# Altium PCB PCB1.PcbDoc
Units mm, origin at the board's own origin, x right, y up, seen from the top; angles counter-clockwise.
Board outline 50.31 x 50.26 mm, 4 copper layers (Top Layer, POWER, GND, Bottom Layer), stack 0.778 mm thick; 53 components, 117 nets, 397 pads, 103 vias.
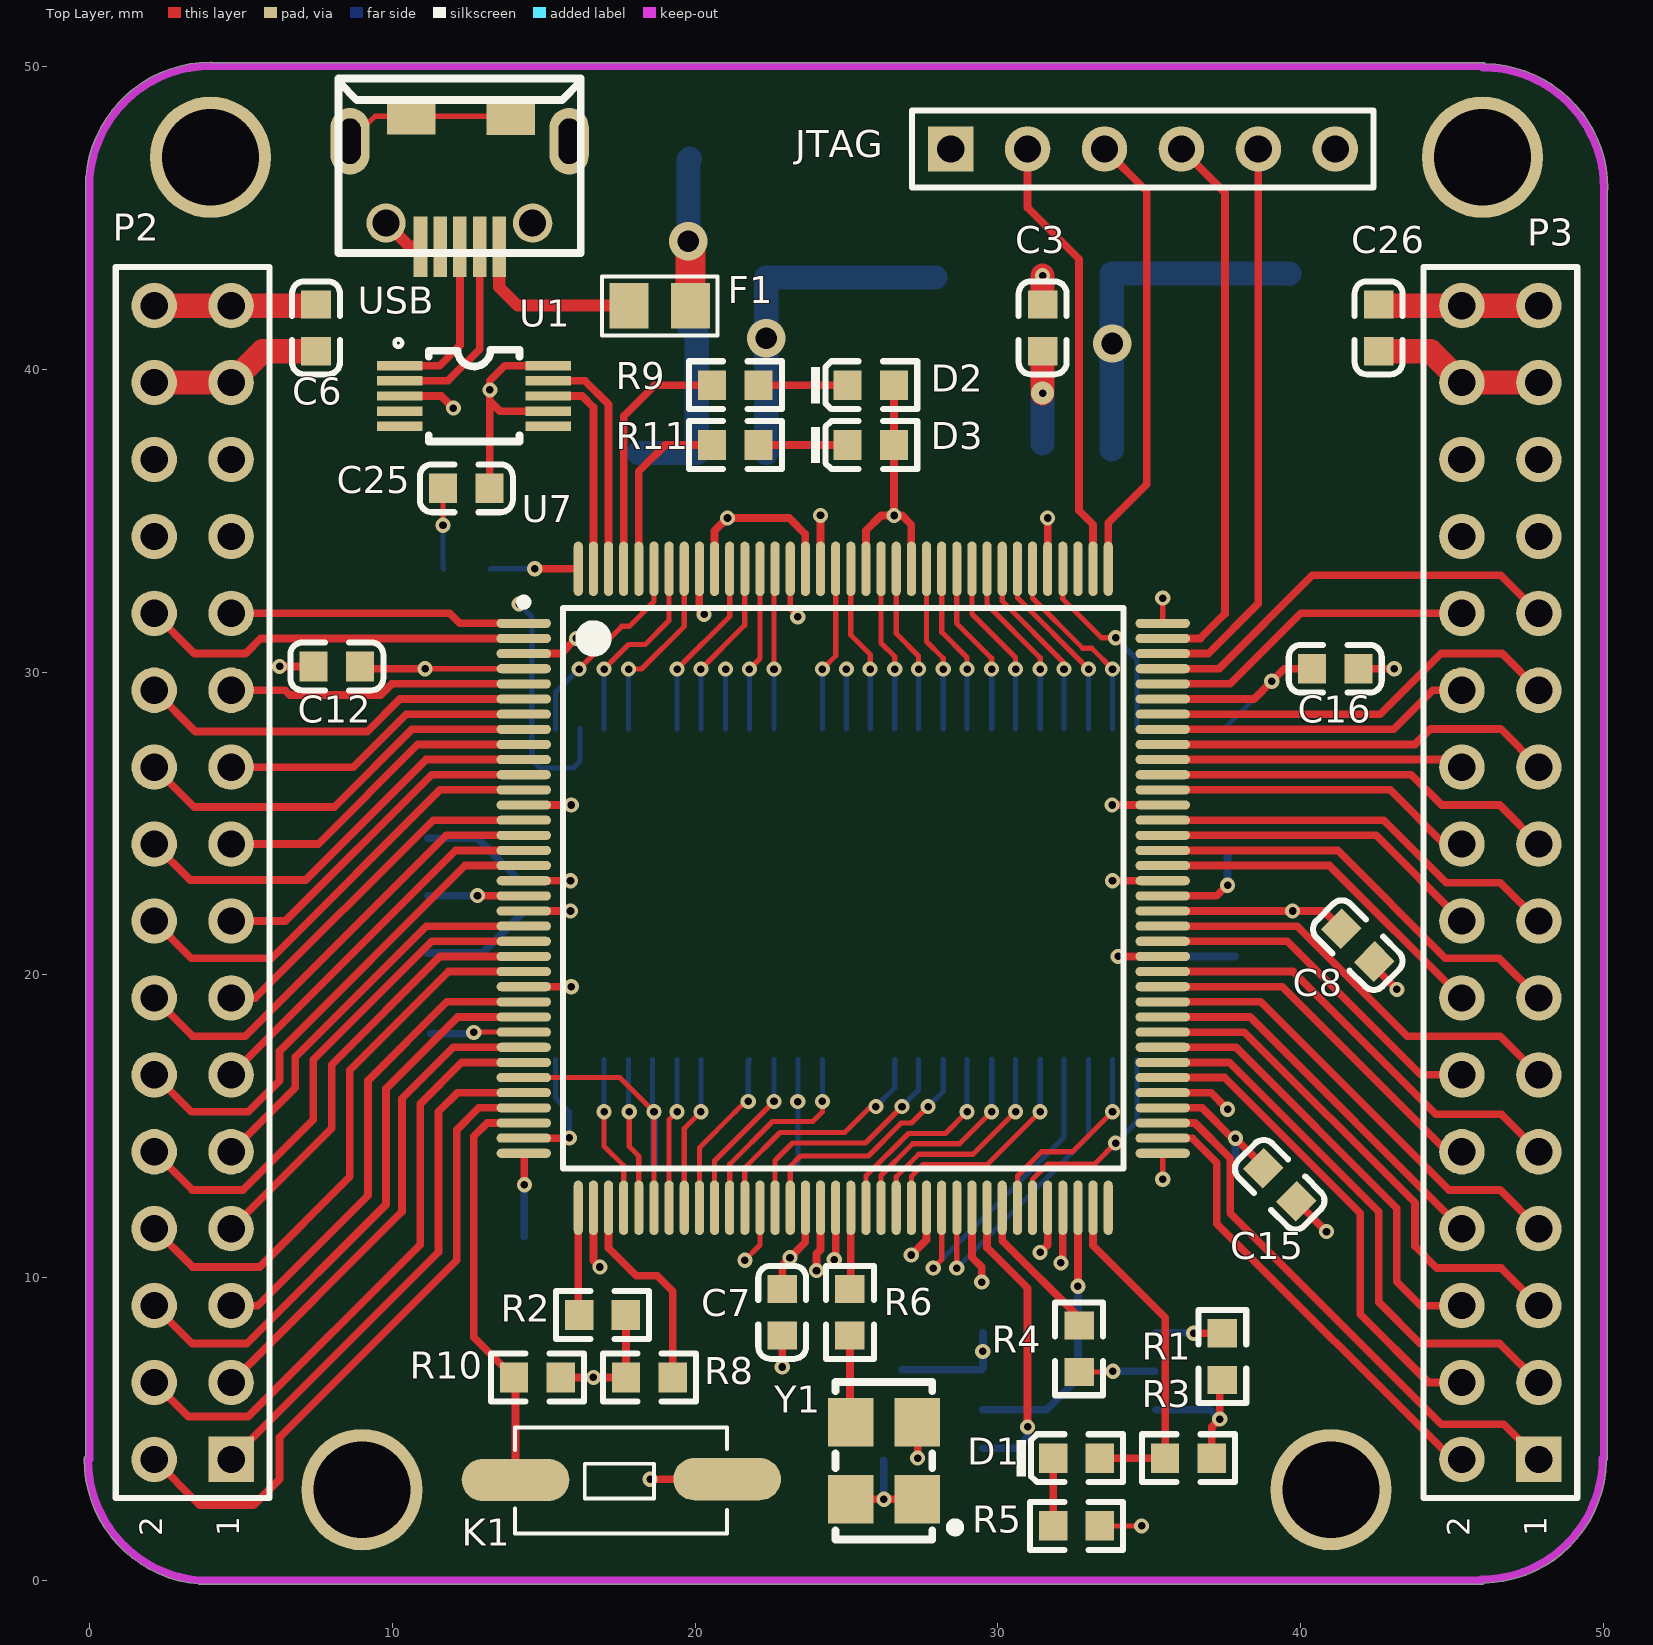
[diagram p0: Top Layer view]
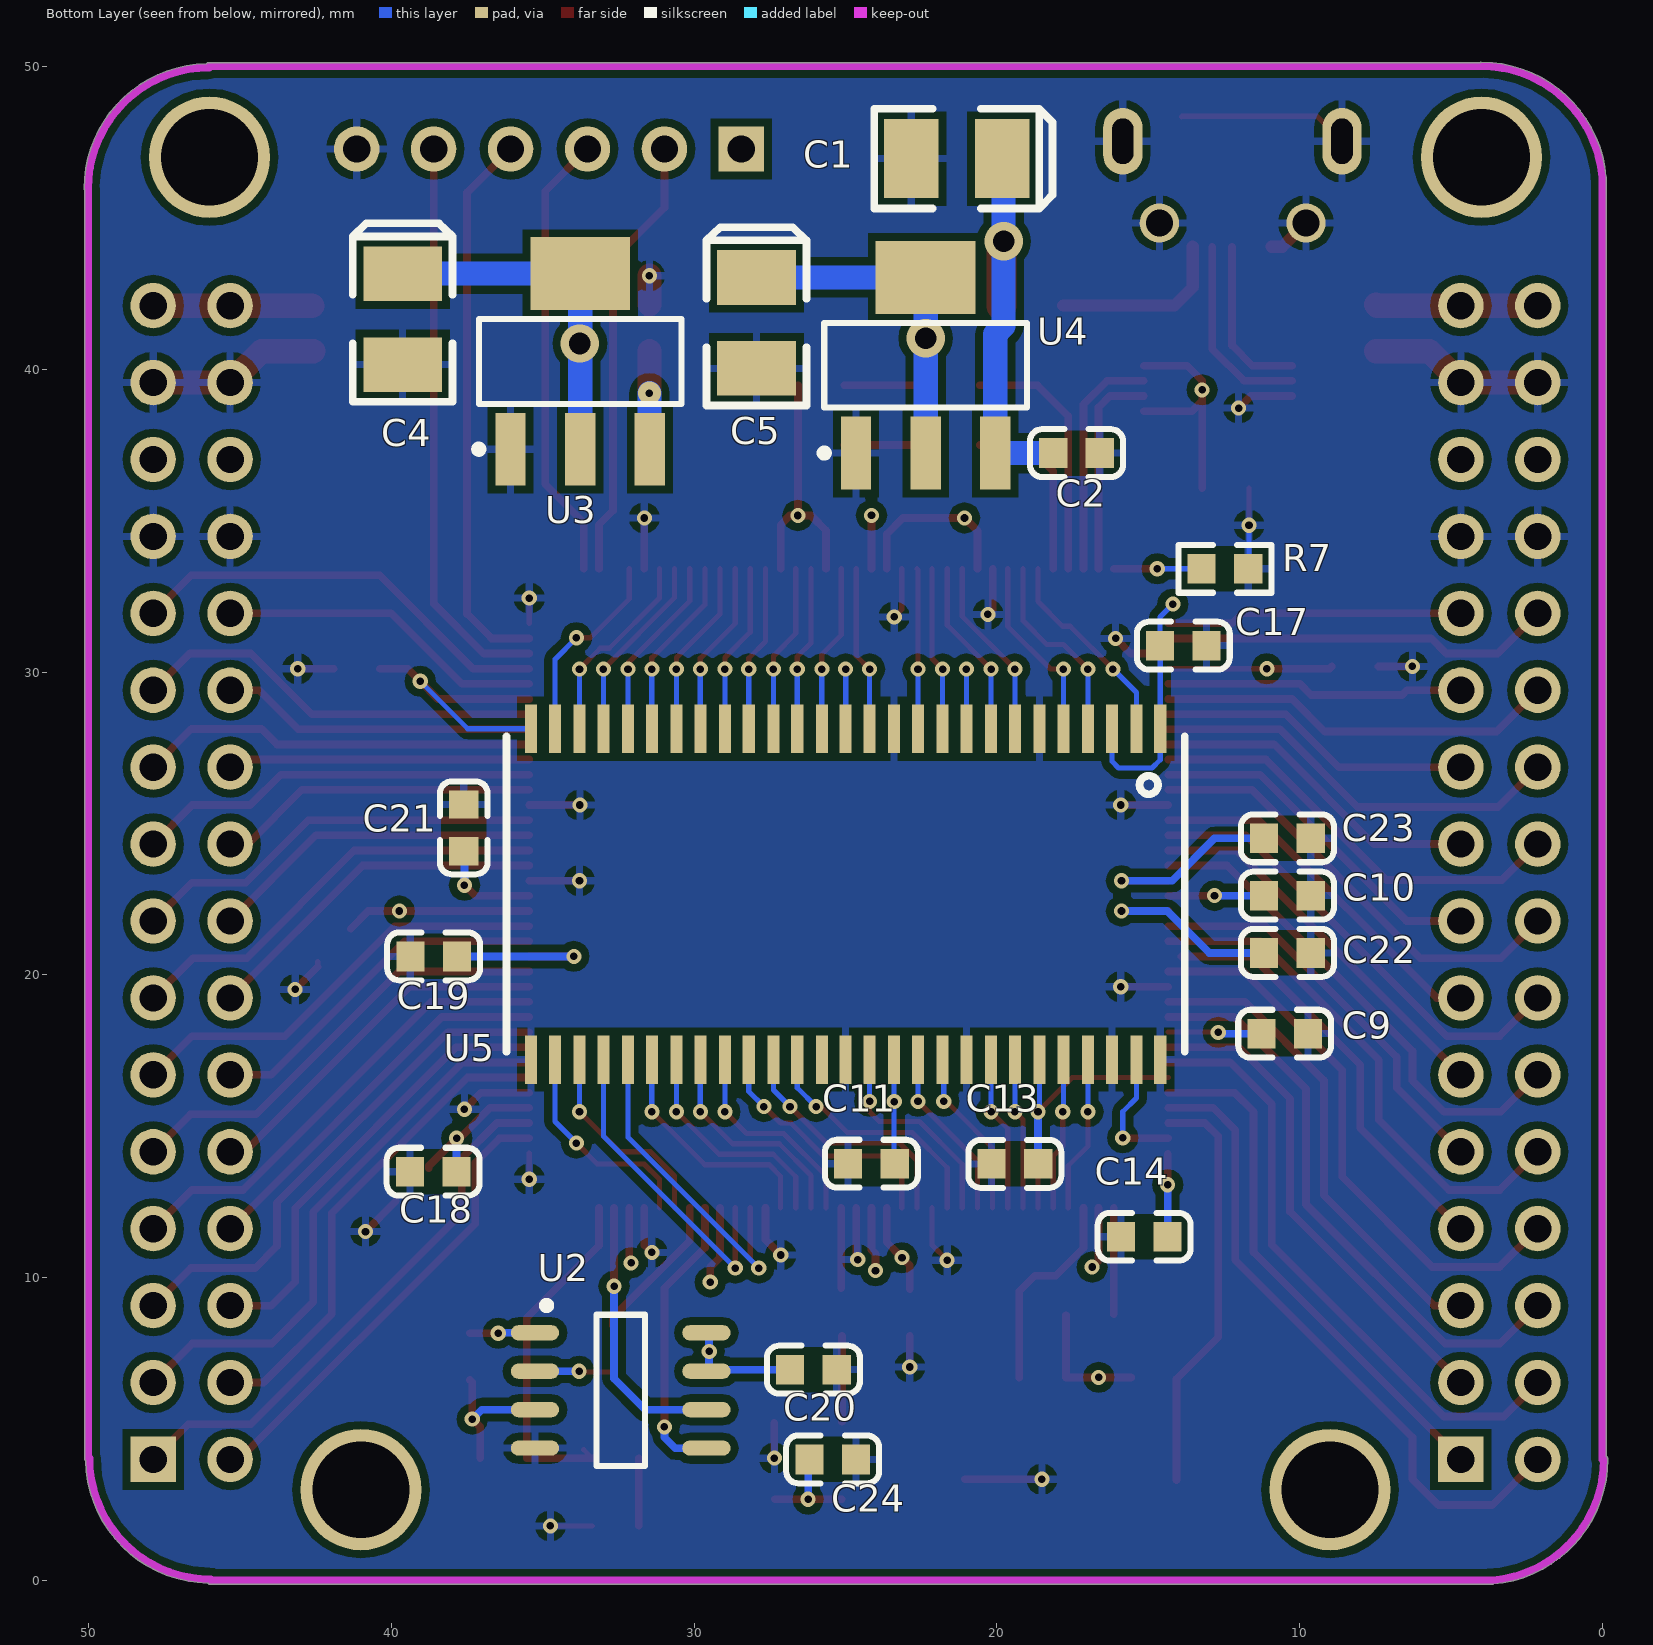
[diagram p1: Bottom Layer view, seen from below]
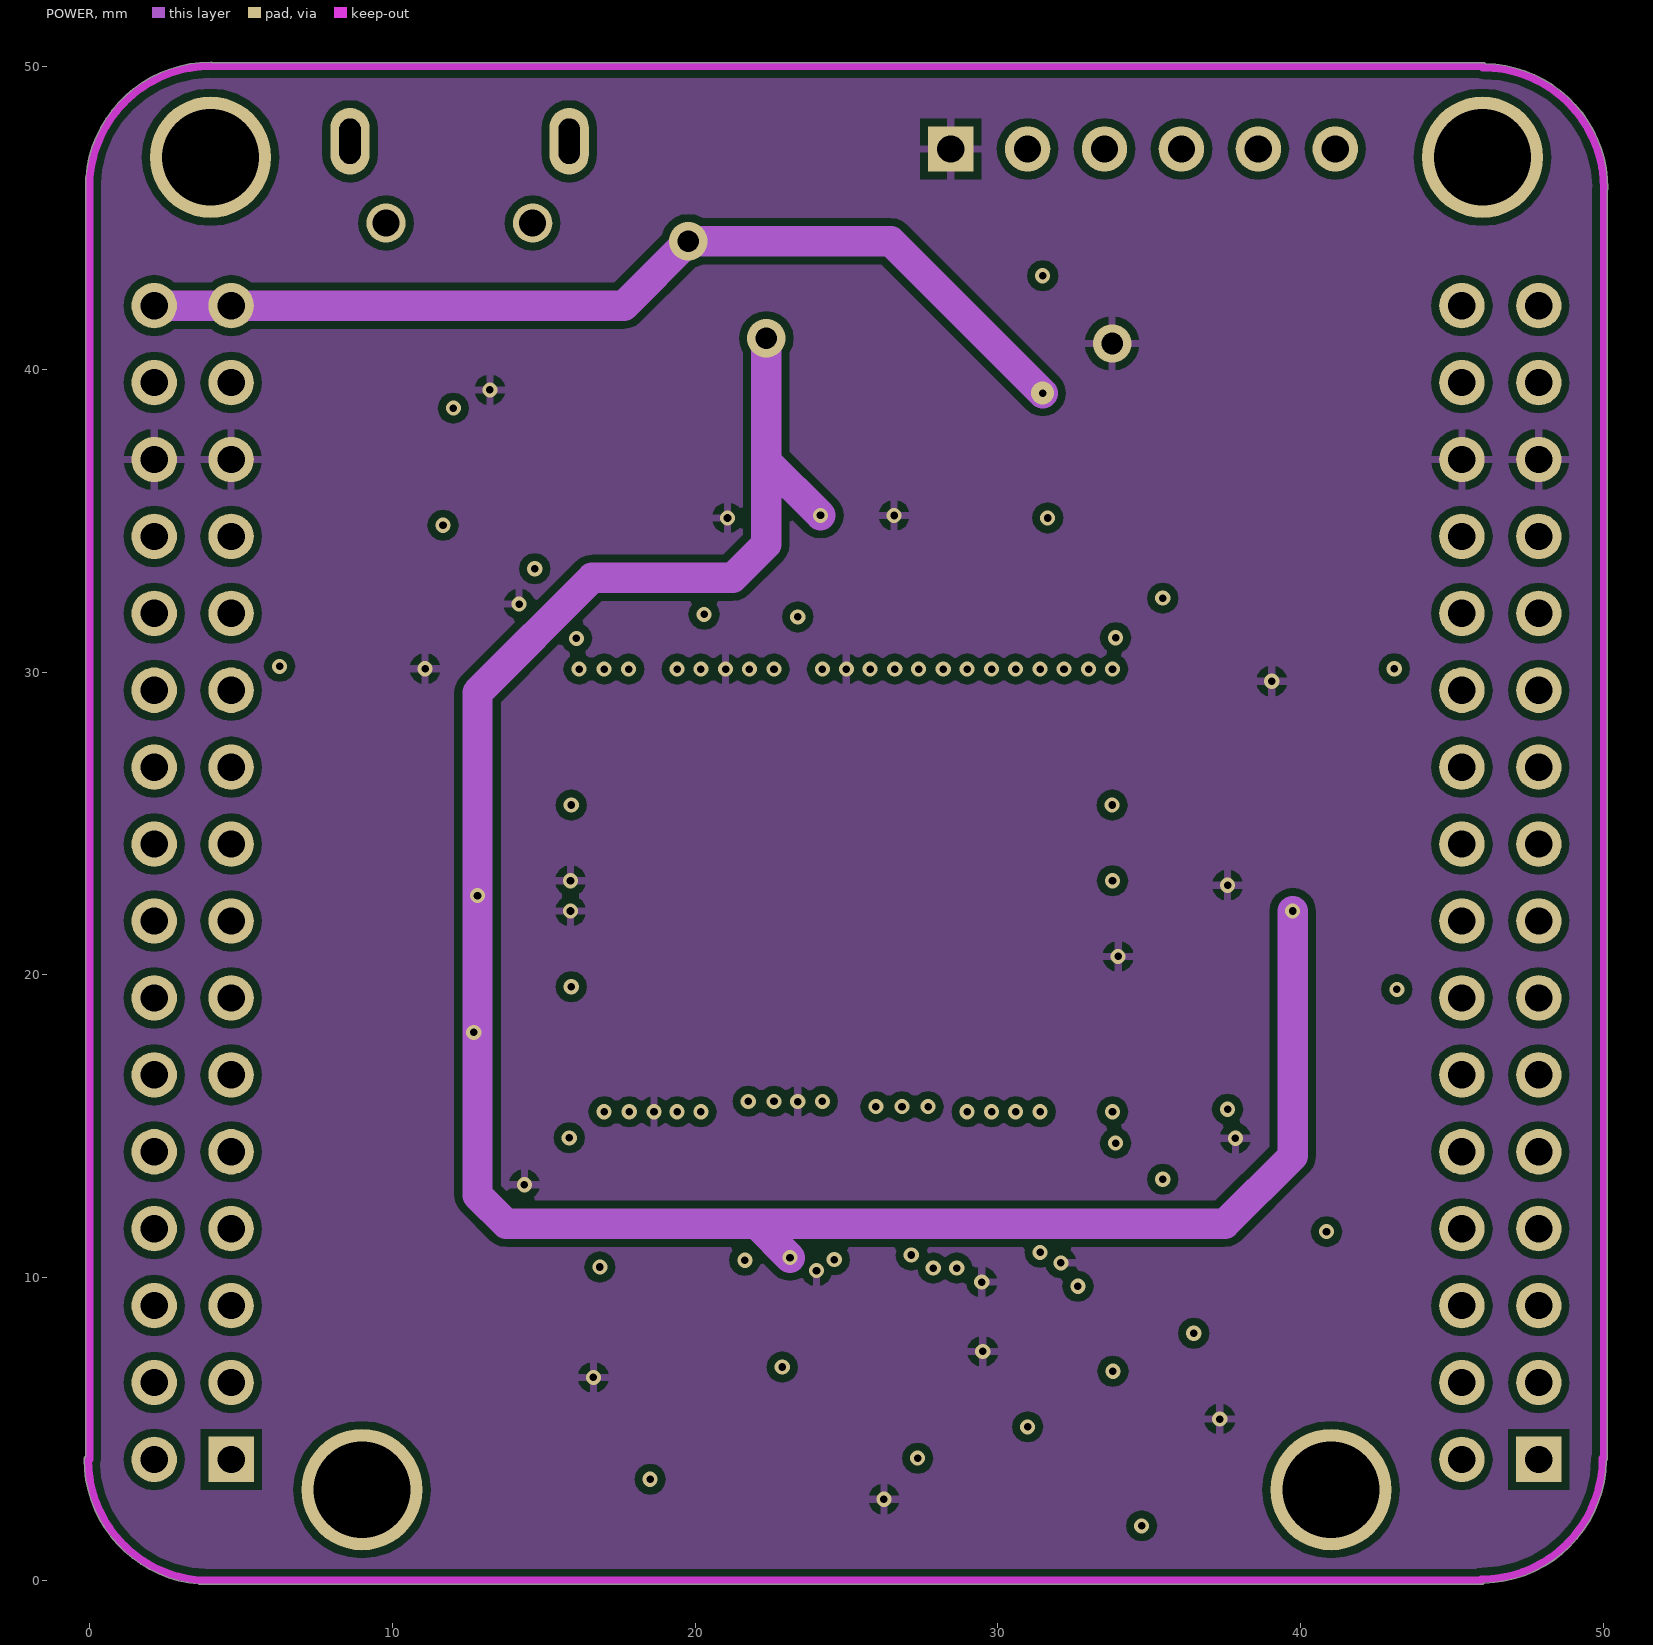
[diagram p2: POWER]
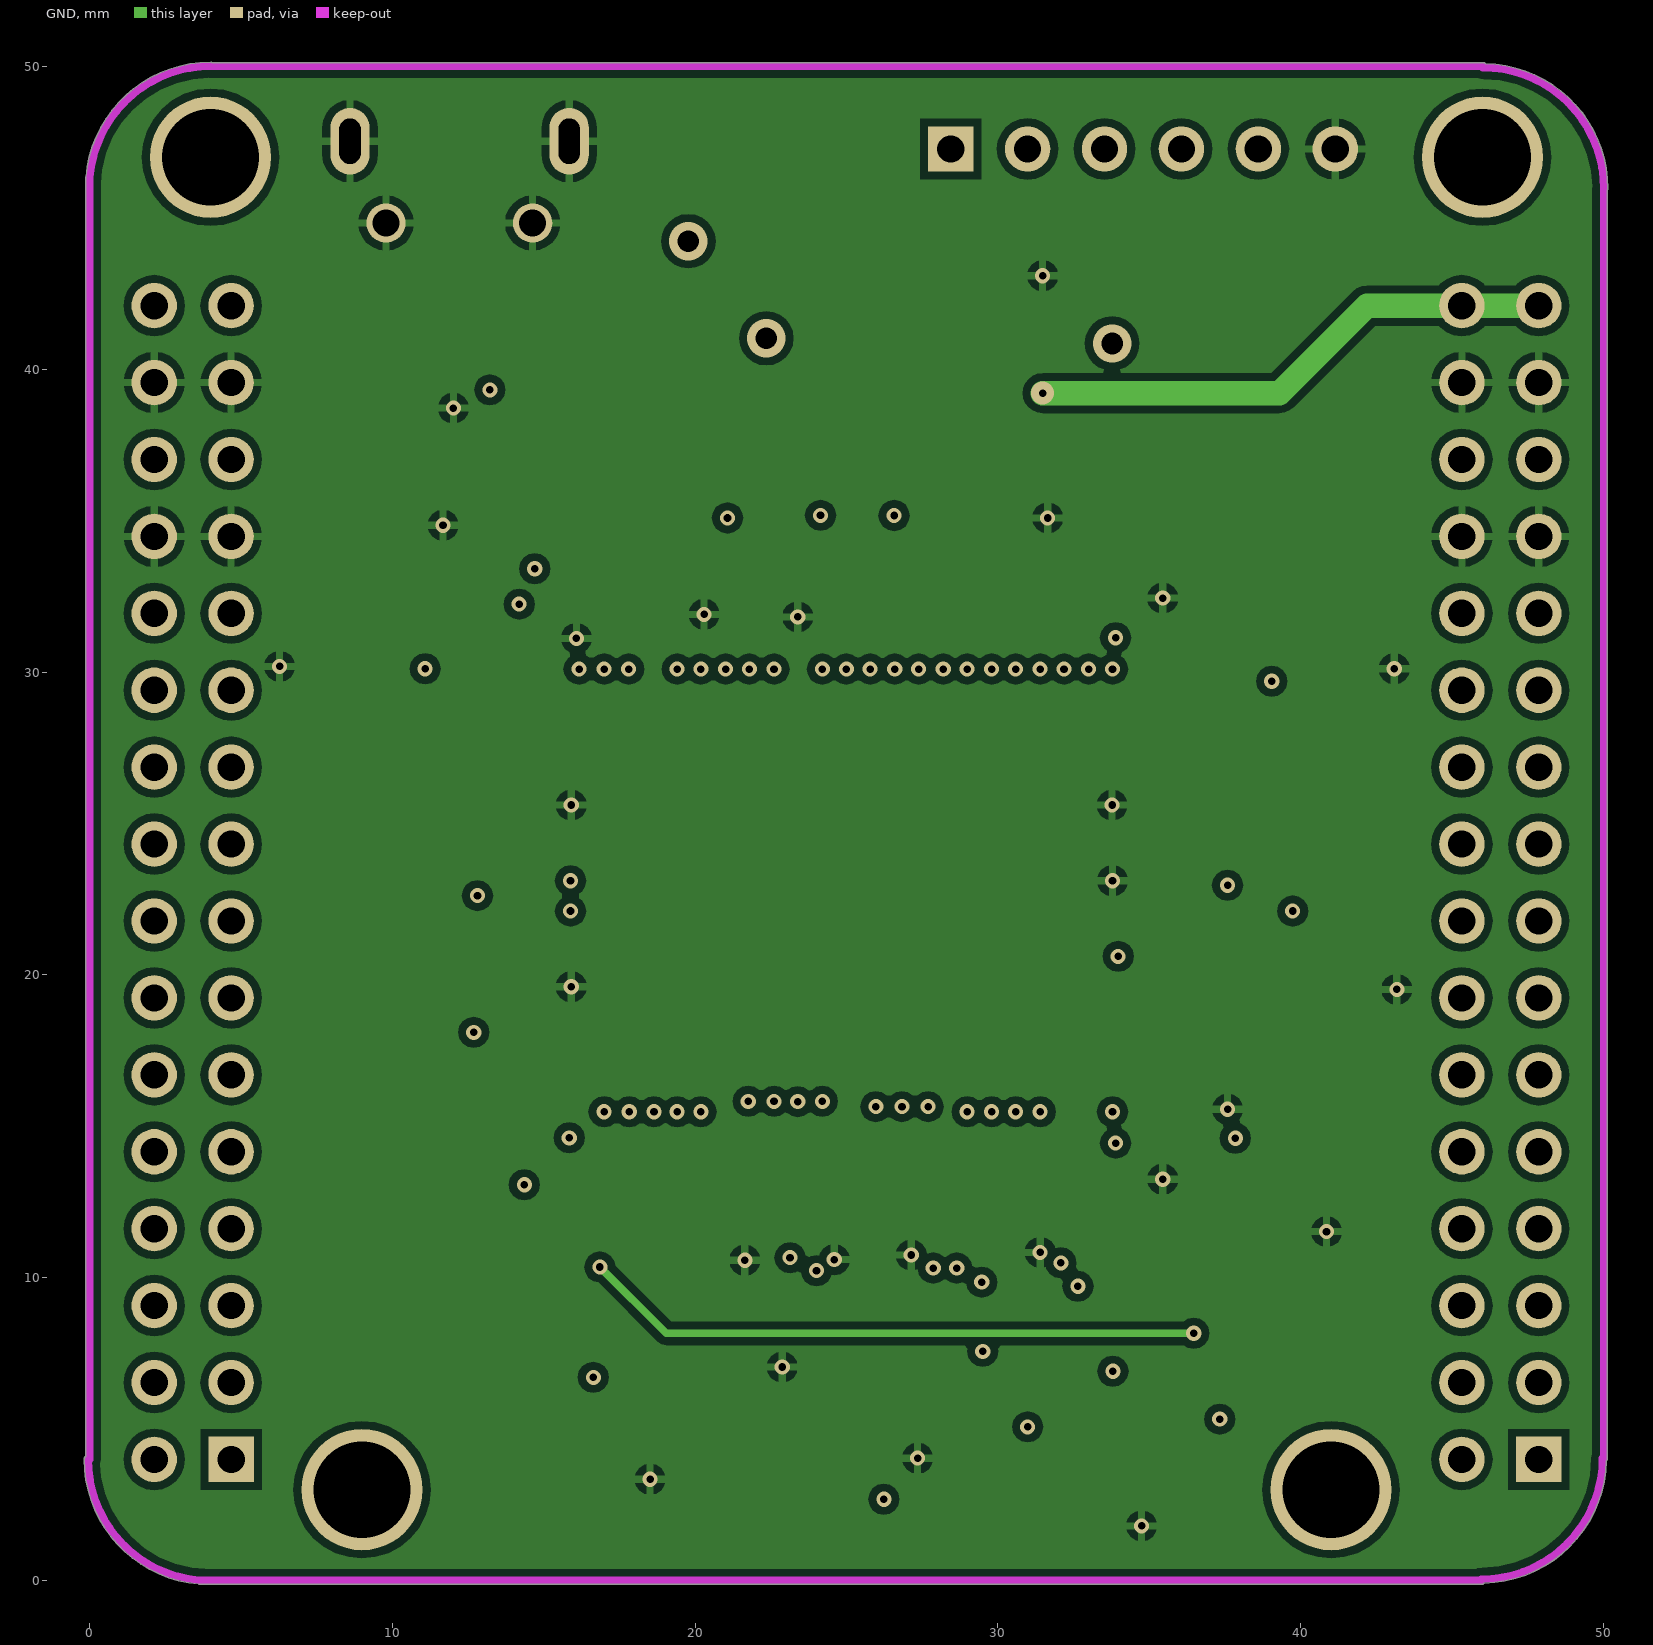
[diagram p3: GND]
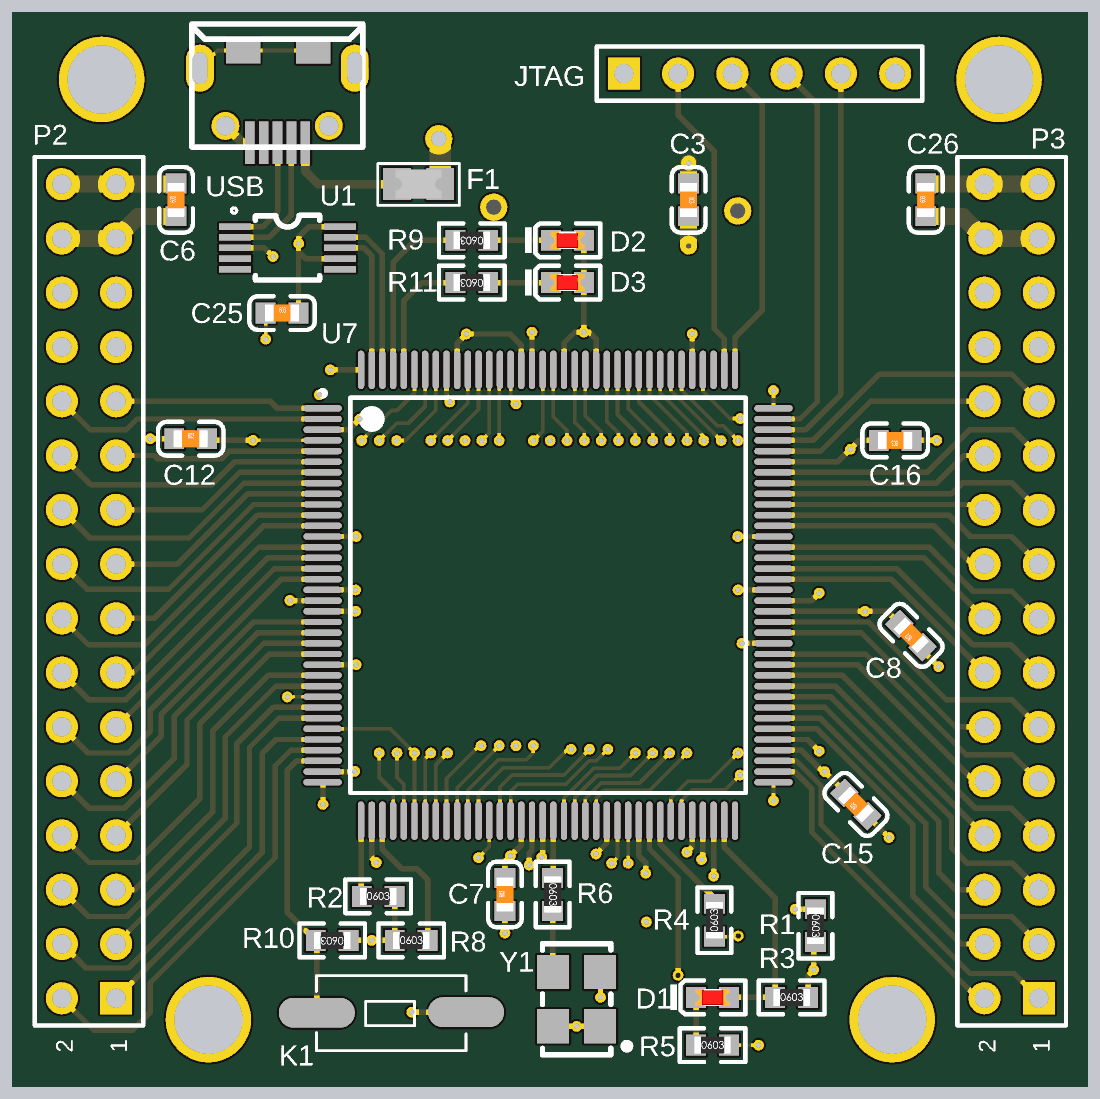
[diagram p4: 3D render of the assembled board from above, using the file's embedded part models]
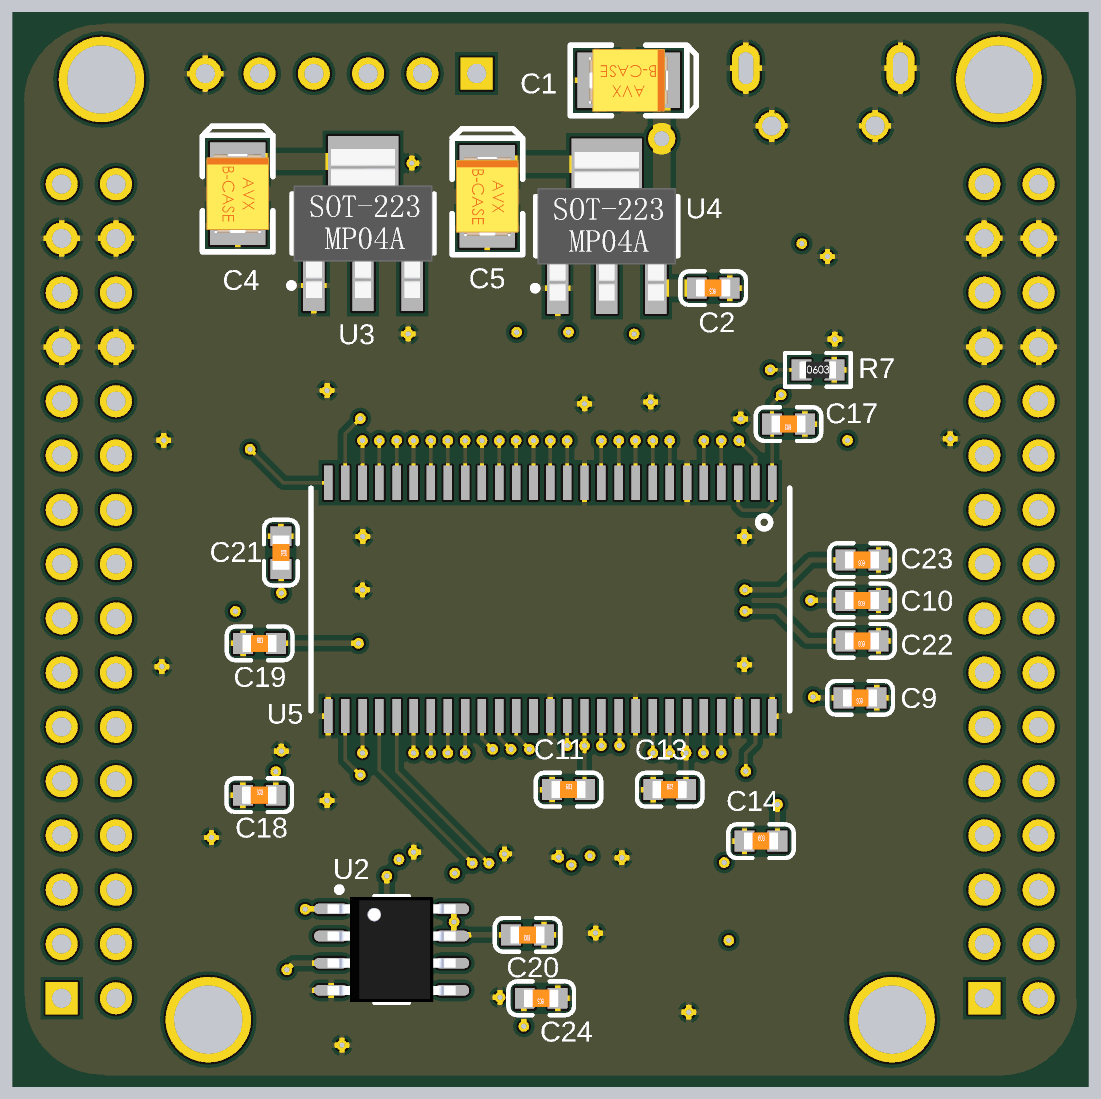
[diagram p5: 3D render of the assembled board from below, using the file's embedded part models]

## Layer stack, top to bottom
Top Solder: solder mask 0.0102, Solder Resist, Dk 3.5
Top Layer: signal copper 0.0356
Dielectric 1: core 0.254, FR-4, Dk 4.2
POWER: signal copper 0.036
Dielectric 3: prepreg 0.127, Dk 4.2
GND: signal copper 0.036
Dielectric 2: core 0.254, Dk 4.2
Bottom Layer: signal copper 0.0356
Bottom Solder: solder mask 0.0102, Solder Resist, Dk 3.5

## Board outline
3.955,-0.127 ccw(c3.956,0) 3.956,-0.127 45.966,-0.127 ccw(c45.966,0) 46.062,-0.084 ccw(c45.966,4.042) 50.092,3.954 ccw(c50,4.042) 50.127,4.042 50.127,45.917 ccw(c50.01,45.966) 50.137,45.966 ccw(c46.012,45.966) 46.101,50.091 ccw(c46.012,50) 46.012,50.127 21.501,50.127 4.049,50.127 ccw(c4,50.01) 4,50.137 ccw(c4,46.01) -0.127,46.011 ccw(c0,46.01) -0.127,46.01 -0.127,4.096 ccw(c-0.044,4) -0.171,4 ccw(c3.956,4)

## Design rules (kind name [scope] priority, off if disabled: settings)
Clearance [All] p1: gap=0.172 ignorepadtopadclearanceinfootprint=TRUE except(0.254: Arc-Poly Track-Poly SMDPad-Poly THPad-Poly Via-Poly Fill-Poly Poly-Poly Poly-Region Poly-Text Poly-Hole)
HoleSize [All] p1: absolutevalues=TRUE maxlimit=2.54 minlimit=0.25 maxpercent=80.000 minpercent=20.000
PolygonConnect [All] p1: connectstyle=Relief reliefconductorwidth=0.254 reliefentries=4 polygonreliefangle="90 Angle" airgapwidth=0.254
RoutingVias [All] p1: holewidth=0.711 width=1.27 viastyle="Through Hole" minholewidth=0.25 minwidth=0.45 maxholewidth=0.711 maxwidth=1.27
SolderMaskExpansion [All] p1: expansion=0.102
UnRoutedNet [All] p1: checkbadconnections=TRUE
Width [All] p1: maxlimit=1 minlimit=0.172 preferedwidth=1 toplayer_minwidth=0.254 toplayer_prefwidth=0.254 midlayer2_maxwidth=0.8 midlayer2_prefwidth=0.8 bottomlayer_prefwidth=0.172 minimp=50.000000 maximp=50.000000 favimp=50.000000
28 further rules are at their usual default settings.

## Classes and differential pairs
component class Sheet4: C6 C22 C23 C24 C26 D2 D3 K1 P2 P3 P? R9 R10 R11 U5
component class Sheet2: R7 R8 U7
component class Sheet1: C1 C2 C3 C4 C5 C7 C8 C9 C10 C11 C12 C13 C14 C15 C16 C17 C18 C19 C20 C21 C25 D1 F1 JTAG R1 R2 R3 R4 R5 R6 U1 U2 U3 U4 USB Y1

## Components (designator, comment, footprint, x,y, rotation, side; value= is the part's Value field where it differs from the comment)
C1 "100uF (107) ±10% 6.3V" CASE-B_3528 21.328,46.956 r180 bottom
C2 "104" 0603_C 17.372,37.232 r0 bottom
C3 "104" 0603_C 31.476,41.366 r270 top
C4 "100uF (107) ±10% 6.3V" CASE-B_3528 39.624,41.656 r90 bottom
C5 "100uF (107) ±10% 6.3V" CASE-B_3528 27.94,41.529 r90 bottom
C6 "104" 0603_C 7.482,41.366 r90 top
C7 "104" 0603_C 22.876,8.858 r90 top
C8 "104" 0603_C 41.882,20.984 r135 top
C9 "104" 0603_C 10.496,18.06 r0 bottom
C10 "104" 0603_C 10.406,22.618 r0 bottom
C11 "104" 0603_C 24.142,13.766 r180 bottom
C12 "104" 0603_C 8.17,30.186 r0 top
C13 "104" 0603_C 19.406,13.76 r180 bottom
C14 "104" 0603_C 15.136,11.352 r180 bottom
C15 "104" 0603_C 39.302,13.072 r135 top
C16 "104" 0603_C 41.139,30.11 r180 top
C17 "104" 0603_C 13.846,30.874 r0 bottom
C18 "104" 0603_C 38.614,13.502 r180 bottom
C19 "104" 0603_C 38.599,20.61 r180 bottom
C20 "104" 0603_C 26.058,6.966 r0 bottom
C21 "104" 0603_C 37.607,24.854 r270 bottom
C22 "104" 0603_C 10.406,20.726 r0 bottom
C23 "104" 0603_C 10.406,24.51 r0 bottom
C24 "104" 0603_C 25.422,4 r0 bottom
C25 "104" 0603_C 12.446,36.068 r0 top
C26 "104" 0603_C 42.57,41.366 r90 top
D1 "红灯 0603" 0603_LED_S1 32.594,4.042 r0 top
D2 "红灯 0603" 0603_LED_S1 25.8,39.474 r0 top
D3 "红灯 0603" 0603_LED_S1 25.8,37.496 r0 top
F1 "500mA" PTC[0805] 18.834,42.1 r180 top
JTAG "Header 6" HDR1X6 28.439,47.273 r0 top (schematic designator P1)
K1 "K_轻触开关" KEY 17.526,3.302 r0 top
P2 "Header 16X2" HDR2X16 4.68,4 r90 top locked
P3 "Header 16X2" HDR2X16 47.86,4 r90 top locked
R1 "10K" 0603_R 37.41,7.396 r270 top
R2 "10K" 0603_R 16.942,8.772 r0 top
R3 "330" 0603_R 36.292,4.042 r0 top
R4 "33" 0603_R 32.68,7.654 r90 top
R5 "330" 0603_R 32.594,1.806 r0 top
R6 "33" 0603_R 25.112,8.858 r270 top
R7 "4.7K" 0603_R 12.47,33.41 r180 bottom
R8 "10K" 0603_R 18.49,6.708 r0 top
R9 "330" 0603_R 21.328,39.474 r180 top
R10 "10k" 0603_R 14.792,6.708 r180 top
R11 "330" 0603_R 21.328,37.496 r180 top
U1 "CH340E" MSOP10 12.7,39.116 r0 top
U2 "M25P16" SO-8 32.422,6.278 r180 bottom
U3 "AMS1117-3.3" SOT-223(AMS1117-3.3) 33.759,40.259 r180 bottom
U4 "AMS1117-1.2" SOT-223(AMS1117-3.3) 22.352,40.132 r180 bottom
U5 "SDRAM" SDRAM 25.273,22.479 r0 bottom locked
U7 "XC6SLX9-N3TQG144C" TQG144_N 24.892,22.86 r0 top locked
USB "MICRO-USB" MICRO-USB 11.938,46.228 r90 top (schematic designator USB1)
Y1 "50Mhz" XTAL5032 26.23,3.956 r90 top

## Footprints (in the part's own frame and the unit in brackets; to place one, negate y for a bottom-side part, rotate by r counter-clockwise, add the part's x,y. Pads: shape width x height; smd on the part's side, far side on the other; paste and mask are expansions set on the pad)
0603_C [mm]
  rect 0.93x0.98 smd: 1(-0.77,0) 2(0.77,0)
  silkscreen extent -1.53,-0.79 1.54,0.79, body extent -0.8,-0.4 0.8,0.4, height 0.3
0603_LED_S1 [mm]
  rect 0.93x0.98 smd: A(0.77,0) K(-0.77,0)
  silkscreen extent -1.97,-0.79 1.54,0.79, body extent -0.8,-0.4 0.8,0.4, height 0.6
0603_R [mm]
  rect 0.93x0.98 smd: 1(-0.77,0) 2(0.77,0)
  silkscreen extent -1.53,-0.79 1.54,0.79, body extent -0.85,-0.4 0.85,0.4, height 0.56
CASE-B_3528 [mm]
  rect 1.8x2.6 smd: 1(1.5,0) 2(-1.5,0)
  silkscreen extent -2.73,-1.65 3.16,1.65, body extent -1.85,-1.47 1.85,1.46, height 2.03
HDR1X6 [mm] "Connector; Header; 6 Position"
  rect 1.5x1.5 hole 0.9: 1(0,0)
  round 1.5 hole 0.9: 2(2.54,0) 3(5.08,0) 4(7.62,0) 5(10.16,0) 6(12.7,0)
  silkscreen extent -1.27,-1.27 13.97,1.27
HDR2X16 [mm] "Connector; Header; 16x2 Position"
  rect 1.5x1.5 hole 0.9: 1(0,0)
  round 1.5 hole 0.9: 2(0,2.54) 3(2.54,0) 4(2.54,2.54) 5(5.08,0) 6(5.08,2.54) 7(7.62,0) 8(7.62,2.54) 9(10.16,0) 10(10.16,2.54) 11(12.7,0) 12(12.7,2.54) 13(15.24,0) 14(15.24,2.54) 15(17.78,0) 16(17.78,2.54) 17(20.32,0) 18(20.32,2.54) 19(22.86,0) 20(22.86,2.54) 21(25.4,0) 22(25.4,2.54) 23(27.94,0) 24(27.94,2.54) 25(30.48,0) 26(30.48,2.54) 27(33.02,0) 28(33.02,2.54) 29(35.56,0) 30(35.56,2.54) 31(38.1,0) 32(38.1,2.54)
  silkscreen extent -1.27,-1.27 39.37,3.81
KEY [mil]
  oval 140x55.12 smd: 1(139,1.8) 2(-136,0.8)
  silkscreen extent -137,-69 139,69
MICRO-USB [mm]
  round 1.3 hole 0.9: 0(-1.401,2.145) 0(-1.401,-2.696)
  oval 2.199x1.3 hole 0.7 slot 1.5 at 0 deg: 0(1.299,3.333) 0(1.299,-3.906)
  rect 1.2x1.6 smd: 0(2.11,-1.969) 0(2.127,1.31)
  rect 2x0.45 smd: 1(-2.185,-1.596) 2(-2.185,-0.946) 3(-2.185,-0.296) 4(-2.185,0.354) 5(-2.185,1.004)
  silkscreen extent -2.39,-4.29 3.37,3.71
MSOP10 [mil]
  rect 59.06x12 smd: 1(-96.5,39.37) 2(-96.5,19.68) 3(-96.5,0) 4(-96.5,-19.69) 5(-96.5,-39.37) 6(96.5,-39.37) 7(96.5,-19.69) 8(96.5,0) 9(96.5,19.68) 10(96.5,39.37)
  silkscreen extent -103,-59 59,74
PTC[0805] [mm]
  rect 1.3x1.5 smd: 1(-1.016,0) 2(1.016,0)
  silkscreen extent -1.91,-0.97 1.91,0.99, body extent -1.07,-0.67 1.08,0.68, height 0.66
SDRAM [mil]
  rect 15.7x63 smd: 1(-420,-222.32) 3(-357.05,-222.32) 6(-263,-222.32) 8(-200,-222.32) 9(-168,-222.32) 10(-137.05,-222.32) 11(-105,-222.32) 13(-42.05,-222.32) 15(20,-222.32) 16(52,-222.32) 17(82.95,-222.32) 18(115,-222.32) 20(177.95,-222.32) 22(241,-222.32) 23(272.05,-222.32) 25(335.05,-222.32) 26(367.05,-222.32) 27(398,-222.32) 28(397.95,207.68) 29(367,207.68) 30(335,207.68) 32(272,207.68) 35(177.95,207.68) 37(115,207.68) 38(82.95,207.68) 39(52,207.68) 40(20,207.68) 42(-42.05,207.68) 44(-105,207.68) 45(-137.05,207.68) 46(-168,207.68) 47(-200,207.68) 49(-263,207.68) 52(-357.05,207.68) 54(-420,207.68)
  rect 15.6x63 smd: 2(-389,-222.32) 5(-294,-222.32) 12(-74,-222.32) 19(146,-222.32) 33(241,207.68) 36(146,207.68) 43(-74,207.68) 50(-294,207.68) 53(-389,207.68)
  rect 15.75x63 smd: 4(-325.97,-222.32) 7(-230.97,-222.32) 14(-10.97,-222.32) 31(304.03,207.68) 34(209.03,207.68) 41(-10.97,207.68) 48(-230.97,207.68) 51(-325.97,207.68)
  rect 15.65x63 smd: 21(209.03,-222.32) 24(304.03,-222.32)
  silkscreen extent -452,-212 430,198
SO-8 [mm]
  oval 1.6x0.5 smd: 1(-2.831,1.905) 2(-2.831,0.635) 3(-2.831,-0.635) 4(-2.831,-1.905) 5(2.831,-1.905) 6(2.831,-0.635) 7(2.831,0.635) 8(2.831,1.905)
  silkscreen extent -2.58,-2.5 0.8,2.93, body extent -2.99,-2.45 3,2.45, height 1.55
SOT-223(AMS1117-3.3) [mm]
  rect 1x2.4 smd: 1(-2.3,-2.9) 2(0,-2.9) 3(2.3,-2.9)
  rect 3.3x2.4 smd: 4(0,2.9)
  silkscreen extent -3.48,-3.02 3.35,1.4, body extent -3.25,-3.48 3.25,3.48, height 1.7
TQG144_N [mm] "Thin QFP, 144-Leads, Body 20x20mm, Pitch 0.5mm, IPC Medium Density"
  oval 1.8x0.3 smd: 1(-10.55,8.75) 2(-10.55,8.25) 3(-10.55,7.75) 4(-10.55,7.25) 5(-10.55,6.75) 6(-10.55,6.25) 7(-10.55,5.75) 8(-10.55,5.25) 9(-10.55,4.75) 10(-10.55,4.25) 11(-10.55,3.75) 12(-10.55,3.25) 13(-10.55,2.75) 14(-10.55,2.25) 15(-10.55,1.75) 16(-10.55,1.25) 17(-10.55,0.75) 18(-10.55,0.25) 19(-10.55,-0.25) 20(-10.55,-0.75) 21(-10.55,-1.25) 22(-10.55,-1.75) 23(-10.55,-2.25) 24(-10.55,-2.75) 25(-10.55,-3.25) 26(-10.55,-3.75) 27(-10.55,-4.25) 28(-10.55,-4.75) 29(-10.55,-5.25) 30(-10.55,-5.75) 31(-10.55,-6.25) 32(-10.55,-6.75) 33(-10.55,-7.25) 34(-10.55,-7.75) 35(-10.55,-8.25) 36(-10.55,-8.75) 73(10.55,-8.75) 74(10.55,-8.25) 75(10.55,-7.75) 76(10.55,-7.25) 77(10.55,-6.75) 78(10.55,-6.25) 79(10.55,-5.75) 80(10.55,-5.25) 81(10.55,-4.75) 82(10.55,-4.25) 83(10.55,-3.75) 84(10.55,-3.25) 85(10.55,-2.75) 86(10.55,-2.25) 87(10.55,-1.75) 88(10.55,-1.25) 89(10.55,-0.75) 90(10.55,-0.25) 91(10.55,0.25) 92(10.55,0.75) 93(10.55,1.25) 94(10.55,1.75) 95(10.55,2.25) 96(10.55,2.75) 97(10.55,3.25) 98(10.55,3.75) 99(10.55,4.25) 100(10.55,4.75) 101(10.55,5.25) 102(10.55,5.75) 103(10.55,6.25) 104(10.55,6.75) 105(10.55,7.25) 106(10.55,7.75) 107(10.55,8.25) 108(10.55,8.75)
  oval 0.3x1.8 smd: 37(-8.75,-10.55) 38(-8.25,-10.55) 39(-7.75,-10.55) 40(-7.25,-10.55) 41(-6.75,-10.55) 42(-6.25,-10.55) 43(-5.75,-10.55) 44(-5.25,-10.55) 45(-4.75,-10.55) 46(-4.25,-10.55) 47(-3.75,-10.55) 48(-3.25,-10.55) 49(-2.75,-10.55) 50(-2.25,-10.55) 51(-1.75,-10.55) 52(-1.25,-10.55) 53(-0.75,-10.55) 54(-0.25,-10.55) 55(0.25,-10.55) 56(0.75,-10.55) 57(1.25,-10.55) 58(1.75,-10.55) 59(2.25,-10.55) 60(2.75,-10.55) 61(3.25,-10.55) 62(3.75,-10.55) 63(4.25,-10.55) 64(4.75,-10.55) 65(5.25,-10.55) 66(5.75,-10.55) 67(6.25,-10.55) 68(6.75,-10.55) 69(7.25,-10.55) 70(7.75,-10.55) 71(8.25,-10.55) 72(8.75,-10.55) 109(8.75,10.55) 110(8.25,10.55) 111(7.75,10.55) 112(7.25,10.55) 113(6.75,10.55) 114(6.25,10.55) 115(5.75,10.55) 116(5.25,10.55) 117(4.75,10.55) 118(4.25,10.55) 119(3.75,10.55) 120(3.25,10.55) 121(2.75,10.55) 122(2.25,10.55) 123(1.75,10.55) 124(1.25,10.55) 125(0.75,10.55) 126(0.25,10.55) 127(-0.25,10.55) 128(-0.75,10.55) 129(-1.25,10.55) 130(-1.75,10.55) 131(-2.25,10.55) 132(-2.75,10.55) 133(-3.25,10.55) 134(-3.75,10.55) 135(-4.25,10.55) 136(-4.75,10.55) 137(-5.25,10.55) 138(-5.75,10.55) 139(-6.25,10.55) 140(-6.75,10.55) 141(-7.25,10.55) 142(-7.75,10.55) 143(-8.25,10.55) 144(-8.75,10.55)
  silkscreen extent -10.67,-9.25 9.25,9.57, body extent -10,-10 10,10, height 1.6
XTAL5032 [mm]
  rect 1.6x1.5 smd: 1(-1.27,-1.104) 2(1.27,-1.104) 3(1.27,1.096) 4(-1.27,1.096)
  silkscreen extent -2.6,-2.5 2.6,1.6

## Part data
C1 C4 C5: library part "3528 100uF (107) 10% 6.3V", "钽电容", Package=3528, SuppliersPartNumber=C16133, ComponentLink1Description=供应商, ComponentLink1URL=http://www.szlcsc.com/product/details_16815.html, Supplier=LC
C2 C3 C6 C7 C8 C9 C10 C11 C12 C13 C14 C15 C16 C17 C18 C19 C20 C21 C22 C23 C24 C25 C26: library part "0603 30pF (300) 5% 50V", "贴片电容", Package=0603, SuppliersPartNumber=C22397, ComponentLink1Description=供应商, ComponentLink1URL=http://www.szlcsc.com/product/details_23122.html, Supplier=LC
D1 D2 D3: library part "0603 红灯", "发光二极管", Package=0603, SuppliersPartNumber=C2286, ComponentLink1Description=供应商, ComponentLink1URL=http://www.szlcsc.com/product/details_2659.html, Supplier=LC
F1: library part PTC
JTAG: "Header, 6-Pin", LatestRevisionDate=17-Jul-2002, LatestRevisionNote="Re-released for DXP Platform.", Publisher="Altium Limited"
P2 P3: "Header, 16-Pin, Dual row", LatestRevisionDate=17-Jul-2002, LatestRevisionNote="Re-released for DXP Platform.", Publisher="Altium Limited"
R1 R2 R3 R4 R5 R6 R7 R8 R9 R10 R11: library part "0603 9.1KΩ (9101) 1%", "贴片电阻", Package=0603, SuppliersPartNumber=C23260, ComponentLink1Description=供应商, ComponentLink1URL=http://www.szlcsc.com/product/details_23987.html, Supplier=LC
U2: library part W25Q64
U4: library part AMS1117-3.3
U7: "Spartan-6 LX 1.2V FPGA, 102 User I/Os, 144-Pin TQFP (0.5mm Pitch), Speed Grade 3N, Commercial Grade, Pb-Free", Code_JEDEC=MS-026-BFB, ComponentLink1Description="Manufacturer Link", ComponentLink1URL=http://www.xilinx.com, ComponentLink2Description="Spartan-6 Datasheet", ComponentLink2URL=http://www.xilinx.com/support/documentation/data_sheets/ds160.pdf, ComponentLink3Description="Spartan-6 Documents", ComponentLink3URL=http://www.xilinx.com/support/documentation/spartan-6.htm, ComponentLink4Description="Xilinx.com Home", ComponentLink4URL=http://www.xilinx.com, DatasheetVersion="ver1.6, Nov-2010", PackageDescription="144-Pin Thin Quad Flat Pack (TQG144) - Pb-Free", PackageReference=TQG144, PackageVersion="ver1.2, Jun-2004", Published=24-Aug-2010, Publisher="Altium Limited"
Y1: library part 有源晶振

## Free pads (board coordinates)
  round 4 hole 3.2: 1(4,47) 2(46,47) 3(41,3) 4(9,3)

## Via types
v1: diameter 0.5, hole 0.25, Top Layer to Bottom Layer, 99 vias
v2: diameter 1.27, hole 0.711, Top Layer to Bottom Layer, 3 vias
v3: diameter 0.76, hole 0.25, Top Layer to Bottom Layer, 1 vias

## Nets (pads, with @x,y where several pads share a name; then routed paths per layer and width w, separated by ;. In a path a pad name is that pad's centre, name@x,y a point inside that pad or via, vN(x,y) a via of type N, cw(c..) or ccw(c..) an arc to the next point about the centre after c; other vN are vias at no path point)
CLK: R6.1 U7.55 | length 2.7
  Top Layer w0.172: R6.1 R6.1@25.142,9.658
  Top Layer w0.254: R6.1@25.142,9.658 U7.55
DONE: D1.A R3.1 U7.71 | length 11.8
  Top Layer w0.172: D1.A D1.A@33.642,4.32
  Top Layer w0.254: U7.71 33.142,11.062 35.522,8.682 R3.1 D1.A
FlashCS: R1.1 U2.1 U7.38 | length 24.8
  Top Layer w0.254: U7.38 16.642,10.568 v1(16.856,10.354) ; v1(36.464,8.166) R1.1
  GND w0.254: v1(16.856,10.354) 19.044,8.166 v1(36.464,8.166)
  Bottom Layer w0.172: U2.1@35.167,8.183 U2.1 ; v1@36.447,8.183 v1(36.464,8.166)
  Bottom Layer w0.254: U2.1 v1@36.447,8.183
FlashSCK: U2.6 U7.70 | length 9.2
  Top Layer w0.254: v1(32.642,9.718) U7.70
  Bottom Layer w0.254: U2.6@29.505,5.643 31.615,5.643 32.642,6.67 v1(32.642,9.718)
FlashSI: U2.5 U7.64 | length 9.8
  Top Layer w0.254: U7.64 29.642,10.986 30.979,9.649 v1(30.979,5.074)
  Bottom Layer w0.254: U2.5@29.505,4.373 30.616,4.373 30.979,4.736 v1(30.979,5.074)
FlashSO: R4.2 U7.65 | length 4.9
  Top Layer w0.254: U7.65 30.142,11.224 32.68,8.686 R4.2
GND: C1.2 C2.1 C3.1 C4.2 C5.2 C6.1 C7.1 C8.1 C9.1 C10.1 C11.1 C12.1 C13.1 C14.1 C15.1 C16.1 C17.1 C18.1 C19.1 C20.1 C21.1 C22.1 C23.1 C24.1 C25.1 C26.1 JTAG.6 K1.1 P2.25 P2.26 P2.29 P2.30 P3.25 P3.26 P3.29 P3.30 R5.2 R7.2 U1.3 U2.4 U3.1 U4.1 U5.6 U5.12 U5.28 U5.41 U5.46 U5.52 U5.54 U7.3 U7.13 U7.25 U7.49 U7.54 U7.60 U7.68 U7.73 U7.77 U7.91 U7.96 U7.108 U7.113 U7.130 U7.136 USB.0 USB.5 Y1.2 | length 59.9
  Top Layer w0.172: USB.0@8.605,47.527 9.432,48.355 10.628,48.355 13.891,48.355 USB.0@13.907,48.338 ; v1(11.676,34.846) C25.1 ; v1(21.642,10.578) 22.142,11.078 U7.49 ; U7.130 23.142,32.07 v1(23.392,31.82) ; v1(24.596,10.598) v1@24.642,10.644 ; Y1.2 Y1.2@27.348,5.212 ; C3.1@31.476,41.854 C3.1@31.562,41.768 ; R5.2 v1(34.744,1.806) ; v1(35.442,13.254) U7.73 ; U7.108 v1(35.442,32.443) ; C8.1@42.426,20.268 C8.1 ; v1(43.172,19.522) v1@43.258,19.436
  Top Layer w0.254: v1(6.278,30.186) C12.1 ; U1.3 11.624,39.116 v1@12.04,38.7 ; U7.25 v1(15.91,19.61) ; U7.13 v1(15.91,25.61) ; U7.3 15.582,30.61 v1(16.082,31.11) ; v1(18.514,3.348) K1.1 ; U7.136 20.142,32.06 v1(20.296,31.906) ; v1(22.876,7.052) C7.1 ; v1@24.642,10.644 U7.54 ; v1(27.139,10.75) 27.642,11.253 U7.60 ; v1(27.348,4.042) Y1.2@27.348,5.212 ; v1(31.394,10.836) 31.642,11.084 U7.68 ; U7.113 v1(31.642,35.088) ; v1(33.769,25.61) U7.96 ; v1(33.783,23.11) U7.91 ; U7.77 37.038,16.11 v1(37.582,15.566) ; C15.1 v1(40.85,11.524) ; C16.1 v1(43.086,30.11) ; C8.1@42.426,20.268 v1(43.172,19.522)
  Top Layer w0.4: USB.0@9.793,44.827 10.578,44.043 USB.5
  Top Layer w0.8: P2.30 P2.29 5.716,40.596 C6.1 ; C3.1 v1(31.476,43.086) ; C26.1 44.284,40.596 P3.30 P3.29
  Bottom Layer w0.172: v1(11.676,34.846) 11.676,33.434 R7.2
  other v1: 12.02,38.716
IO1: P2.23 U7.1 | length 9.8
  Top Layer w0.254: P2.23 11.9,31.94 12.23,31.61 U7.1
IO2: P2.24 U7.2 | length 13
  Top Layer w0.254: P2.24 3.47,30.61 5.154,30.61 5.654,31.11 U7.2
IO5: P2.21 U7.5 | length 9.9
  Top Layer w0.254: P2.21 6.462,29.4 6.622,29.24 9.621,29.24 9.991,29.61 U7.5
IO6: P2.22 U7.6 | length 13.2
  Top Layer w0.254: P2.22 3.504,28.036 9.174,28.036 10.248,29.11 U7.6
IO7: P2.19 U7.7 | length 10.4
  Top Layer w0.254: P2.19 8.714,26.86 10.464,28.61 U7.7
IO8: P2.20 U7.8 | length 13.8
  Top Layer w0.254: P2.20 3.458,25.542 8.084,25.542 10.652,28.11 U7.8
IO9: P2.17 U7.9 | length 11
  Top Layer w0.254: P2.17 7.55,24.32 10.84,27.61 U7.9
IO10: P2.18 U7.10 | length 14.3
  Top Layer w0.254: P2.18 3.326,23.134 7.138,23.134 11.114,27.11 U7.10
IO11: P2.15 U7.11 | length 11.7
  Top Layer w0.254: P2.15 6.472,21.78 11.302,26.61 U7.11
IO12: P2.16 U7.12 | length 15
  Top Layer w0.254: P2.16 3.366,20.554 6.02,20.554 11.576,26.11 U7.12
IO14: P2.13 U7.14 | length 12.1
  Top Layer w0.254: P2.13 5.48,19.24 11.35,25.11 U7.14
IO15: P2.14 U7.15 | length 15.5
  Top Layer w0.254: P2.14 3.406,17.974 5.146,17.974 11.782,24.61 U7.15
IO16: P2.11 U7.16 | length 12.7
  Top Layer w0.254: P2.11 12.09,24.11 U7.16
IO17: P2.12 U7.17 | length 16.6
  Top Layer w0.254: P2.12 3.36,15.48 5.246,15.48 6.278,16.512 6.278,17.488 12.4,23.61 U7.17
IO21: P2.9 U7.21 | length 13.3
  Top Layer w0.254: P2.9 6.794,16.274 6.794,17.286 11.118,21.61 U7.21
IO22: P2.10 U7.22 | length 17.3
  Top Layer w0.254: P2.10 3.4,12.9 5.074,12.9 7.396,15.222 7.396,17.2 11.306,21.11 U7.22
IO23: P2.7 U7.23 | length 14.4
  Top Layer w0.254: P2.7@4.68,11.818 P2.7 7.998,14.938 7.998,17.032 11.576,20.61 U7.23@13.907,20.61
IO24: P2.8 U7.24 | length 18.8
  Top Layer w0.254: P2.8 3.406,10.354 5.624,10.354 8.6,13.33 8.6,16.856 11.854,20.11 U7.24
IO26: P2.5 U7.26 | length 16
  Top Layer w0.254: P2.5 5.554,9.08 9.202,12.728 9.202,16.512 11.8,19.11 U7.26
IO27: P2.6 U7.27 | length 19.4
  Top Layer w0.254: P2.6 3.394,7.826 5.2,7.826 9.793,12.42 9.793,16.243 12.16,18.61 U7.27
IO29: P2.3 U7.29 | length 16.4
  Top Layer w0.254: P2.3 10.32,12.18 10.32,15.91 12.02,17.61 U7.29
IO30: P2.4 U7.30 | length 20.2
  Top Layer w0.254: P2.4 3.262,5.418 5.246,5.418 10.922,11.094 10.922,15.738 12.294,17.11 U7.30
IO32: P2.1 U7.32 | length 17.4
  Top Layer w0.254: P2.1 11.524,10.844 11.524,15.48 12.154,16.11 U7.32
IO33: P2.2 U7.33 | length 21.6
  Top Layer w0.254: P2.2 3.646,2.494 5.418,2.494 6.278,3.354 6.278,4.734 12.126,10.582 12.126,14.878 12.858,15.61 U7.33
IO74: P3.2 U7.74 | length 15.5
  Top Layer w0.254: U7.74 36.422,14.61 37.23,13.802 37.23,11.782 45.012,4 P3.2
IO75: P3.1 U7.75 | length 18.1
  Top Layer w0.254: U7.75 36.508,15.11 37.668,13.95 37.668,12.13 44.638,5.16 46.7,5.16 P3.1
IO78: P3.4 U7.78 | length 16
  Top Layer w0.254: U7.78 37.484,16.61 41.968,12.126 41.968,8.79 44.218,6.54 P3.4
IO79: P3.3 U7.79 | length 18.5
  Top Layer w0.254: U7.79 37.642,17.11 42.57,12.182 42.57,9.2 43.944,7.826 46.574,7.826 P3.3
IO80: P3.6 U7.80 | length 14.8
  Top Layer w0.254: U7.80 37.86,17.61 43.172,12.298 43.172,9.872 43.964,9.08 P3.6
IO81: P3.5 U7.81 | length 17
  Top Layer w0.254: U7.81 38.134,18.11 43.774,12.47 43.774,11.042 44.496,10.32 46.62,10.32 P3.5
IO82: P3.8 U7.82 | length 12.8
  Top Layer w0.254: U7.82 38.33,18.61 P3.8
IO83: P3.7 U7.83 | length 15.5
  Top Layer w0.254: U7.83 38.682,19.11 44.892,12.9 46.58,12.9 P3.7
IO84: P3.10 U7.84 | length 12.1
  Top Layer w0.254: U7.84 39.386,19.61 44.836,14.16 P3.10
IO85: P3.9 U7.85 | length 14.9
  Top Layer w0.254: U7.85 39.746,20.11 44.462,15.394 46.626,15.394 P3.9
IO87: P3.12 U7.87 | length 11.7
  Top Layer w0.254: U7.87 39.554,21.11 43.964,16.7 P3.12
IO88: P3.11 U7.88 | length 14.5
  Top Layer w0.254: U7.88 39.886,21.61 43.522,17.974 46.586,17.974 P3.11
IO92: P3.14 U7.92 | length 11.7
  Top Layer w0.254: U7.92 40.95,23.61 P3.14
IO93: P3.13 U7.93 | length 14.4
  Top Layer w0.254: U7.93 41.22,24.11 44.776,20.554 46.546,20.554 P3.13
IO94: P3.16 U7.94 | length 11.1
  Top Layer w0.254: U7.94 42.49,24.61 P3.16
IO95: P3.15 U7.95 | length 13.8
  Top Layer w0.254: U7.95 42.744,25.11 44.806,23.048 46.592,23.048 P3.15
IO97: P3.18 U7.97 | length 10.6
  Top Layer w0.254: U7.97 42.948,26.11 44.738,24.32 P3.18
IO98: P3.17 U7.98 | length 13.4
  Top Layer w0.254: U7.98 43.652,26.61 44.652,25.61 46.57,25.61 P3.17
IO99: P3.20 U7.99 | length 10
  Top Layer w0.254: U7.99 45.07,27.11 P3.20
IO100: P3.19 U7.100 | length 13.2
  Top Layer w0.254: U7.100 43.772,27.61 44.284,28.122 46.598,28.122 P3.19
IO101: P3.22 U7.101 | length 10.4
  Top Layer w0.254: U7.101 43.074,28.11 44.364,29.4 P3.22
IO102: P3.21 U7.102 | length 13.8
  Top Layer w0.254: U7.102 42.628,28.61 44.634,30.616 46.644,30.616 P3.21
IO104: P3.24 U7.104 | length 10.8
  Top Layer w0.254: U7.104 37.668,29.61 39.998,31.94 P3.24
IO105: P3.23 U7.105 | length 14.2
  Top Layer w0.254: U7.105 37.3,30.11 40.386,33.196 46.604,33.196 P3.23
KEY: K1.2 R10.2 U7.34 | length 13.8
  Top Layer w0.254: K1.2 14.072,6.654 12.692,8.034 12.692,14.67 13.132,15.11 U7.34
LED1: R11.2 U7.140 | length 6
  Top Layer w0.254: U7.140 18.142,36.632 19.006,37.496 R11.2
LED2: R9.2 U7.141 | length 8.4
  Top Layer w0.254: U7.141 17.642,38.454 18.662,39.474 R9.2
NetD1_K: D1.K R5.1 | length 2.2
  Top Layer w0.254: R5.1 D1.K
NetD2_K: D2.K R9.1 | length 2.9
  Top Layer w0.254: R9.1 D2.K
NetD3_K: D3.K R11.1 | length 2.9
  Top Layer w0.254: R11.1 D3.K
NetF1_2: F1.2 USB.1 | length 5.9
  Top Layer w0.4: USB.1 13.534,42.71 14.144,42.1 F1.2
NetR4_1: R4.1 U2.2 | length 2.5
  Top Layer w0.172: R4.1 33.769,6.884 v1(33.798,6.913)
  Bottom Layer w0.254: v1(33.798,6.913) U2.2@35.167,6.913
NetR6_2: R6.2 Y1.3 | length 2.9
  Top Layer w0.172: Y1.3@25.112,5.248 Y1.3
  Top Layer w0.254: Y1.3@25.112,5.248 R6.2
NetR7_1: R7.1 U7.144 | length 2.9
  Top Layer w0.254: v1(14.706,33.41) U7.144
  Bottom Layer w0.172: R7.1 v1(14.706,33.41)
NetR8_2: R8.2 U7.39 | length 6.9
  Top Layer w0.254: U7.39 17.142,10.979 18.059,10.062 18.748,10.062 19.26,9.55 R8.2
NetU1_1: U1.1 USB.3 | length 5.5
  Top Layer w0.254: U1.1 11.564,40.116 12.234,40.786 USB.3
NetU1_2: U1.2 USB.2 | length 6.4
  Top Layer w0.254: U1.2 11.838,39.616 12.884,40.662 USB.2
PROGRAM_B: R2.1 U7.37 | length 3.6
  Top Layer w0.172: R2.1@16.142,8.802 R2.1
  Top Layer w0.254: R2.1@16.142,8.802 U7.37
RAMA0: U5.23 U7.116 | length 6.1
  Top Layer w0.172: U7.116 30.142,32.344 32.182,30.304 v1(32.182,30.1)
  Bottom Layer w0.172: v1(32.182,30.1) 32.182,28.127 U5.23
RAMA1: U5.24 U7.115 | length 6.3
  Top Layer w0.172: U7.115 30.642,32.453 v1(32.995,30.1)
  Bottom Layer w0.172: U5.24 v1(32.995,30.1)
RAMA2: U5.25 U7.114 | length 6.6
  Top Layer w0.172: U7.114 31.142,32.446 32.8,30.788 33.095,30.788 v1(33.783,30.1)
  Bottom Layer w0.172: U5.25 v1(33.783,30.1)
RAMA3: U5.26 U7.112 | length 6.6
  Top Layer w0.172: U7.112 32.142,32.408 33.418,31.132 v1(33.884,31.132)
  Bottom Layer w0.172: v1(33.884,31.132) 34.596,30.42 U5.26
RAMA4: U5.29 U7.67 | length 7.2
  Top Layer w0.172: U7.67 31.142,13.254 31.648,13.76 33.196,13.76 v1(33.884,14.448)
  Bottom Layer w0.172: v1(33.884,14.448) 34.595,15.159 U5.29
RAMA5: U5.30 U7.66 | length 6.8
  Top Layer w0.172: U7.66 30.642,13.359 31.443,14.16 32.463,14.16 v1(33.783,15.48)
  Bottom Layer w0.172: U5.30 33.782,15.481 v1(33.783,15.48)
RAMA6: U5.31 U7.62 | length 10.7
  Top Layer w0.172: v1(28.642,10.32) U7.62
  Bottom Layer w0.172: v1(28.642,10.32) 32.995,14.673 U5.31
RAMA7: U5.32 U7.61 | length 10.8
  Top Layer w0.172: v1(27.864,10.32) 28.142,10.598 U7.61
  Bottom Layer w0.172: v1(27.864,10.32) 32.182,14.638 U5.32
RAMA8: U5.33 U7.59 | length 7.9
  Top Layer w0.172: U7.59 27.142,13.35 27.526,13.734 29.648,13.734 v1(31.394,15.48)
  Bottom Layer w0.172: v1(31.394,15.48) U5.33
RAMA9: U5.34 U7.58 | length 7.6
  Top Layer w0.172: U7.58 26.642,13.337 27.383,14.078 29.18,14.078 v1(30.582,15.48)
  Bottom Layer w0.172: v1(30.582,15.48) U5.34
RAMA10: U5.22 U7.117 | length 6
  Top Layer w0.172: U7.117 29.642,32.226 31.394,30.474 v1(31.394,30.1)
  Bottom Layer w0.172: U5.22 v1(31.394,30.1)
RAMA11: U5.35 U7.57 | length 7.3
  Top Layer w0.172: U7.57 26.142,13.38 27.184,14.422 28.735,14.422 v1(29.793,15.48)
  Bottom Layer w0.172: v1(29.793,15.48) U5.35
RAMA12: U5.36 U7.56 | length 7
  Top Layer w0.172: U7.56 25.642,13.366 27.042,14.766 28.267,14.766 v1(28.981,15.48)
  Bottom Layer w0.172: v1(28.981,15.48) U5.36
RAMBA0: U5.20 U7.119 | length 5.8
  Top Layer w0.172: U7.119 28.642,31.608 29.793,30.457 v1(29.793,30.1)
  Bottom Layer w0.172: U5.20 v1(29.793,30.1)
RAMBA1: U5.21 U7.118 | length 5.9
  Top Layer w0.172: U7.118 29.142,31.918 30.582,30.478 v1(30.582,30.1)
  Bottom Layer w0.172: U5.21 v1(30.582,30.1)
RAMCAS: U5.17 U7.123 | length 5.6
  Top Layer w0.172: U7.123 26.642,31.27 27.38,30.532 v1(27.38,30.1)
  Bottom Layer w0.172: U5.17 v1(27.38,30.1)
RAMCKE: U5.37 U7.51 | length 8.5
  Top Layer w0.172: U7.51 23.142,13.682 23.482,14.022 25.721,14.022 26.809,15.11 27.15,15.11 v1(27.692,15.652)
  Bottom Layer w0.172: v1(27.692,15.652) 28.194,16.154 U5.37
RAMCLK: U5.38 U7.50 | length 8.3
  Top Layer w0.172: U7.50 22.642,13.87 23.22,14.448 25.628,14.448 v1(26.832,15.652)
  Bottom Layer w0.172: v1(26.832,15.652) 27.38,16.2 U5.38
RAMCS: U5.19 U7.120 | length 5.6
  Top Layer w0.172: U7.120 28.142,31.318 28.981,30.479 v1(28.981,30.1)
  Bottom Layer w0.172: U5.19 v1(28.981,30.1)
RAMD0: U5.2 U7.139 | length 6.8
  Top Layer w0.172: v1(16.168,30.1) 17.578,31.51 17.826,31.51 18.642,32.326 U7.139
  Bottom Layer w0.172: U5.2 15.392,29.324 v1(16.168,30.1)
RAMD1: U5.4 U7.138 | length 6.5
  Top Layer w0.172: v1(16.993,30.1) 17.801,30.908 18.352,30.908 19.142,31.698 U7.138
  Bottom Layer w0.172: U5.4 v1(16.993,30.1)
RAMD2: U5.5 U7.137 | length 6.3
  Top Layer w0.172: v1(17.805,30.1) 18.232,30.1 19.642,31.51 U7.137
  Bottom Layer w0.172: U5.5 v1(17.805,30.1)
RAMD3: U5.7 U7.134 | length 6
  Top Layer w0.172: v1(19.406,30.1) 21.142,31.836 U7.134
  Bottom Layer w0.172: U5.7 v1(19.406,30.1)
RAMD4: U5.8 U7.133 | length 5.9
  Top Layer w0.172: v1(20.193,30.1) 21.642,31.549 U7.133
  Bottom Layer w0.172: U5.8 v1(20.193,30.1)
RAMD5: U5.10 U7.132 | length 5.4
  Top Layer w0.172: v1(21.792,30.1) 22.142,30.45 U7.132
  Bottom Layer w0.172: U5.10 v1(21.792,30.1)
RAMD6: U5.11 U7.131 | length 5.3
  Top Layer w0.172: v1(22.606,30.1) 22.606,33.374 U7.131
  Bottom Layer w0.172: U5.11 v1(22.606,30.1)
RAMD7: U5.13 U7.127 | length 5.5
  Top Layer w0.172: v1(24.205,30.1) 24.642,30.537 U7.127
  Bottom Layer w0.172: U5.13 v1(24.205,30.1)
RAMD8: U5.42 U7.47 | length 6.9
  Top Layer w0.172: U7.47 21.142,13.746 22.555,15.159 23.884,15.159 24.205,15.48 v1(24.205,15.824)
  Bottom Layer w0.172: v1(24.205,15.824) U5.42
RAMD9: U5.44 U7.46 | length 5.7
  Top Layer w0.172: U7.46 20.642,13.86 v1(22.606,15.824)
  Bottom Layer w0.172: v1(22.606,15.824) U5.44
RAMD10: U5.45 U7.45 | length 5.6
  Top Layer w0.172: U7.45 20.142,14.294 21.328,15.48 21.672,15.824 v1(21.754,15.824)
  Bottom Layer w0.172: v1(21.754,15.824) 21.754,17.166 U5.45
RAMD11: U5.47 U7.44 | length 5.1
  Top Layer w0.172: U7.44 19.642,14.929 v1(20.193,15.48)
  Bottom Layer w0.172: v1(20.193,15.48) U5.47
RAMD12: U5.48 U7.43 | length 5
  Top Layer w0.172: U7.43 19.142,15.216 v1(19.406,15.48)
  Bottom Layer w0.172: v1(19.406,15.48) U5.48
RAMD13: U5.50 U7.41 | length 5
  Top Layer w0.172: v1(17.826,15.48) 17.826,14.338 18.142,14.022 U7.41
  Bottom Layer w0.172: U5.50 17.805,15.5 v1(17.826,15.48)
RAMD14: U5.51 U7.40 | length 5.2
  Top Layer w0.172: v1(16.993,15.48) 16.993,14.345 17.642,13.696 U7.40
  Bottom Layer w0.172: v1(16.993,15.48) U5.51
RAMD15: U5.53 U7.35 | length 4.3
  Top Layer w0.172: v1@15.834,14.61 v1(15.844,14.62)
  Top Layer w0.254: U7.35 v1@15.834,14.61
  Bottom Layer w0.172: U5.53 15.392,15.931 15.844,15.48 v1(15.844,14.62)
RAMLDQM: U5.15 U7.126 | length 5.5
  Top Layer w0.172: U7.126 25.142,31.222 25.781,30.583 v1(25.781,30.1)
  Bottom Layer w0.172: U5.15 v1(25.781,30.1)
RAMRAS: U5.18 U7.121 | length 5.5
  Top Layer w0.172: U7.121 27.642,31.01 28.194,30.458 v1(28.194,30.1)
  Bottom Layer w0.172: U5.18 v1(28.194,30.1)
RAMUDQM: U5.39 U7.48 | length 8.3
  Top Layer w0.172: U7.48 21.642,13.634 22.8,14.792 24.94,14.792 25.8,15.652 v1(25.972,15.652)
  Bottom Layer w0.172: v1(25.972,15.652) 26.594,16.274 U5.39
RAMWE: U5.16 U7.124 | length 5.5
  Top Layer w0.172: U7.124 26.142,30.962 26.594,30.51 v1(26.594,30.1)
  Bottom Layer w0.172: U5.16 v1(26.594,30.1)
TCK: JTAG.3 U7.109 | length 15
  Top Layer w0.254: JTAG.3 34.916,45.876 34.916,36.206 33.642,34.932 U7.109
TDI: JTAG.2 U7.110 | length 14.8
  Top Layer w0.254: JTAG.2 30.979,45.337 32.68,43.636 32.68,35.331 33.142,34.869 U7.110
TDO: JTAG.5 U7.106 | length 18.9
  Top Layer w0.254: U7.106 36.946,30.61 38.599,32.263 JTAG.5
TMS: JTAG.4 U7.107 | length 18.3
  Top Layer w0.254: U7.107 36.686,31.11 37.496,31.92 37.496,45.836 JTAG.4
UARTRX: U1.9 U7.142 | length 7.7
  Top Layer w0.254: U1.9 16.363,39.616 17.142,38.837 U7.142
UARTTX: U1.8 U7.143 | length 7
  Top Layer w0.254: U1.8 16.268,39.116 16.642,38.742 U7.143
VCC5V: C1.1 C2.2 C3.2 C6.2 C26.2 F1.1 P2.31 P2.32 P3.31 P3.32 U3.3 U4.3 | length 77.7
  Top Layer w0.172: C26.2 C26.2@42.606,42.1 ; P3.31@47.824,42.136 P3.31
  Top Layer w0.8: P2.32 P2.31 7.446,42.1 C6.2 ; v3(31.476,39.209) C3.2 ; C26.2@42.606,42.1 P3.32 P3.31
  Top Layer w1: v2(19.78,44.228) 19.85,44.158 F1.1
  POWER w1: P2.32 P2.31 17.652,42.1 v2(19.78,44.228) 26.457,44.228 v3(31.476,39.209)
  GND w0.8: v3(31.476,39.209) 39.295,39.209 42.186,42.1 P3.32 P3.31
  Bottom Layer w0.172: U3.3 U3.3@31.562,37.462
  Bottom Layer w0.8: C2.2 U4.3 20.052,41.155 19.78,41.427 v2(19.78,44.228) 19.78,46.908 C1.1 ; U3.3@31.476,37.548 v3(31.476,39.209)
VCC-1V2: C5.1 C7.2 C8.2 C9.2 C10.2 U4.2 U4.4 U7.19 U7.28 U7.52 U7.89 U7.128 | length 104
  Top Layer w0.172: v1@12.692,18.11 U7.28
  Top Layer w0.254: v1(12.814,22.618) 12.822,22.61 U7.19 ; C7.2 22.876,10.406 v1(23.134,10.664) 23.642,11.172 U7.52 ; U7.128 v1(24.142,35.174) ; U7.89 v1(39.732,22.11) 40.756,22.11 C8.2
  POWER w1: v2(22.352,41.022) 22.352,36.964 ; v1(23.134,10.664) 22.016,11.782 ; v1(24.142,35.174) 22.352,36.964 ; v1(39.732,22.11) 39.732,14.018 37.496,11.782 22.016,11.782 ; 22.016,11.782 13.76,11.782 12.814,12.728 v1(12.814,22.618) 12.814,29.326 16.598,33.11 21.242,33.11 22.352,34.22 22.352,36.964
  Bottom Layer w0.172: v1@12.65,18.06 v1(12.692,18.102)
  Bottom Layer w0.254: C10.2 v1(12.814,22.618) ; C9.2 v1@12.65,18.06
  Bottom Layer w0.8: U4.2 v2(22.352,41.022) U4.4 27.937,43.032 C5.1
VCC-3V3: C4.1 C11.2 C12.2 C13.2 C14.2 C15.2 C16.2 C17.2 C18.2 C19.2 C20.2 C21.2 C22.2 C23.2 C24.2 C25.2 D2.A D3.A JTAG.1 P2.27 P2.28 P3.27 P3.28 R1.2 R2.2 R3.2 R8.1 R10.1 U1.7 U1.10 U2.3 U2.7 U2.8 U3.2 U3.4 U5.1 U5.3 U5.9 U5.14 U5.27 U5.43 U5.49 U7.4 U7.18 U7.20 U7.31 U7.36 U7.42 U7.53 U7.63 U7.69 U7.76 U7.86 U7.90 U7.103 U7.122 U7.125 U7.129 U7.135 Y1.1 Y1.4 | length 130
  Top Layer w0.172: v1(11.084,30.11) U7.4 ; U7.36 U7.36@14.362,14.09 ; U7.31 17.512,16.61 v1(18.642,15.48) U7.42 ; R2.2 R2.2@17.72,8.764
  Top Layer w0.254: C12.2 9.016,30.11 v1(11.084,30.11) ; C25.2 13.216,38.958 ; U7.20 v1(15.886,22.11) ; U7.18 v1(15.886,23.11) ; v1(14.362,13.072) U7.36@14.362,14.09 ; U1.7 13.558,38.616 13.216,38.958 ; U1.10 13.716,40.116 13.216,39.616 13.216,38.958 ; R10.1 v1(16.641,6.708) R8.1 R2.2@17.72,8.764 ; U7.135 20.642,34.66 v1(21.07,35.088) 23.11,35.088 23.642,34.556 U7.129 ; v1(24.009,10.235) 24.009,10.789 24.142,10.922 U7.53 ; Y1.4 v1(26.234,2.686) Y1.1 ; U7.125 25.642,34.672 26.14,35.17 v1(26.57,35.17) ; D2.A D3.A v1(26.57,35.17) ; v1@26.652,35.088 v1(26.57,35.17) ; U7.122 27.142,34.864 26.836,35.17 v1(26.57,35.17) ; U7.63 29.142,10.676 29.464,10.354 v1(29.464,9.856) ; v1(32.078,10.492) 32.142,10.556 U7.69 ; v1(33.97,20.61) U7.86 ; U7.76 36.738,15.61 37.741,14.607 v1(37.84,14.607) 38.758,13.689 C15.2 ; U7.90 37.23,22.61 v1(37.582,22.962) ; U7.103 38.458,29.11 v1(39.044,29.696) 39.458,30.11 C16.2 ; R3.2 37.062,5.07 v1(37.324,5.332) 37.324,6.54 R1.2
  Bottom Layer w0.172: v1(14.19,32.244) 14.616,31.818 C17.2 14.605,30.863 U5.1 14.605,27.105 14.878,26.832 15.981,26.832 16.204,27.055 U5.3 ; C14.2@14.362,11.356 C14.2 ; U5.49 18.593,15.529 v1(18.642,15.48) ; C13.2 C13.2@18.642,13.766 ; U5.9 v1(21.006,30.1) ; C11.2 23.393,13.787 U5.43 ; U5.14 v1(24.994,30.1) ; C24.2 C24.2@26.234,3.958 ; U2.7@29.452,6.966 U2.7@29.505,7.019 ; U2.3@35.167,5.643 U2.3 ; U5.27 37.474,28.126 v1(39.044,29.696) ; v1(37.84,14.607) v1@37.844,14.603
  Bottom Layer w0.254: C22.2 12.986,20.726 14.37,22.11 v1(15.886,22.11) ; C23.2 12.814,24.51 14.214,23.11 v1(15.886,23.11) ; C14.2@14.362,11.356 v1(14.362,13.072) ; C13.2@18.642,13.766 v1(18.642,15.48) ; v1(26.234,2.686) C24.2@26.234,3.958 ; C20.2 U2.7@29.452,6.966 ; U2.7@29.505,7.019 U2.8@29.505,8.183 ; v1(33.97,20.61) C19.2 ; U2.3 37.013,5.643 v1(37.324,5.332) ; v1(37.582,22.962) 37.582,23.998 C21.2@37.668,24.084 ; C18.2 v1@37.844,14.603
  Bottom Layer w0.8: U3.2 U3.4 39.621,43.159 C4.1
  other v1: 29.498,7.568 23.392,15.817 13.224,39.318
  other v2: 33.769,40.85
pads on no net: U1.4 U1.5 U1.6 U5.40 U7.72 U7.111 USB.4

## Polygon pours and split planes (outlines as drawn)
GND on GND "GND-GND" (solid, remove dead copper, pour order 4): -5.074,54.008 -5.246,53.836 -5.246,-1.72 60.2,-1.72 59.512,-1.032 59.512,52.03
VCC-3V3 on POWER "POWER-VCC-3V3" (solid, remove dead copper, pour order 8): -3.526,54.094 -2.15,52.718 -2.15,-4.128 52.804,-4.128 52.976,-4.3 52.976,53.32
GND on Bottom Layer "Bottom Layer-GND" (solid, remove dead copper, pour order 6): -2.236,52.718 -2.236,-2.15 -3.354,-3.268 57.62,-3.268 57.62,45.838 51.084,52.374

## Keep-outs
Keep-Out Layer:
  lines w0.254: -0.044,4 ccw(c3.956,4) 3.956,0 45.966,0 ; 0,4 0,46.01 cw(c4,46.01) 4,50.01 ; 4,50 21.501,50 46.012,50 ; 45.966,0.042 ccw(c45.966,4.042) 49.966,4.042 ; 46.012,49.964 cw(c46.012,45.966) 50.01,45.966 ; 50,4.042 50,45.966

## Silkscreen, mask and mechanical layers (free items; w line width, h text height)
Mechanical 1:
  lines w0.254: -0.086,3.956 ccw(c3.914,3.956) 3.914,-0.044 45.88,-0.044 ; 0,4.042 0,46.01 cw(c4,46.01) 4,50.01 ; 6.742,50 4,50 45.976,50 ; 46.01,0.042 ccw(c46.01,4.042) 50.01,4.042 ; 46.012,49.966 cw(c46.012,45.966) 50.012,45.966 ; 50,4.042 50,45.966

## Text inside footprints (layer, text, board x,y; h text height)
P2: Top Overlay "1" at 5.188,1.46 h1.27 r90; Top Overlay "2" at 2.648,1.46 h1.27 r90
P3: Top Overlay "1" at 48.368,1.46 h1.27 r90; Top Overlay "2" at 45.828,1.46 h1.27 r90